# Altium PCB A2_v40.PcbDoc
Units mm, origin at the board's own origin, x right, y up, seen from the top; angles counter-clockwise.
Board outline 94 x 75 mm, 2 copper layers (Top Layer, Bottom Layer); 20 components, 28 nets, 109 pads, 0 vias.
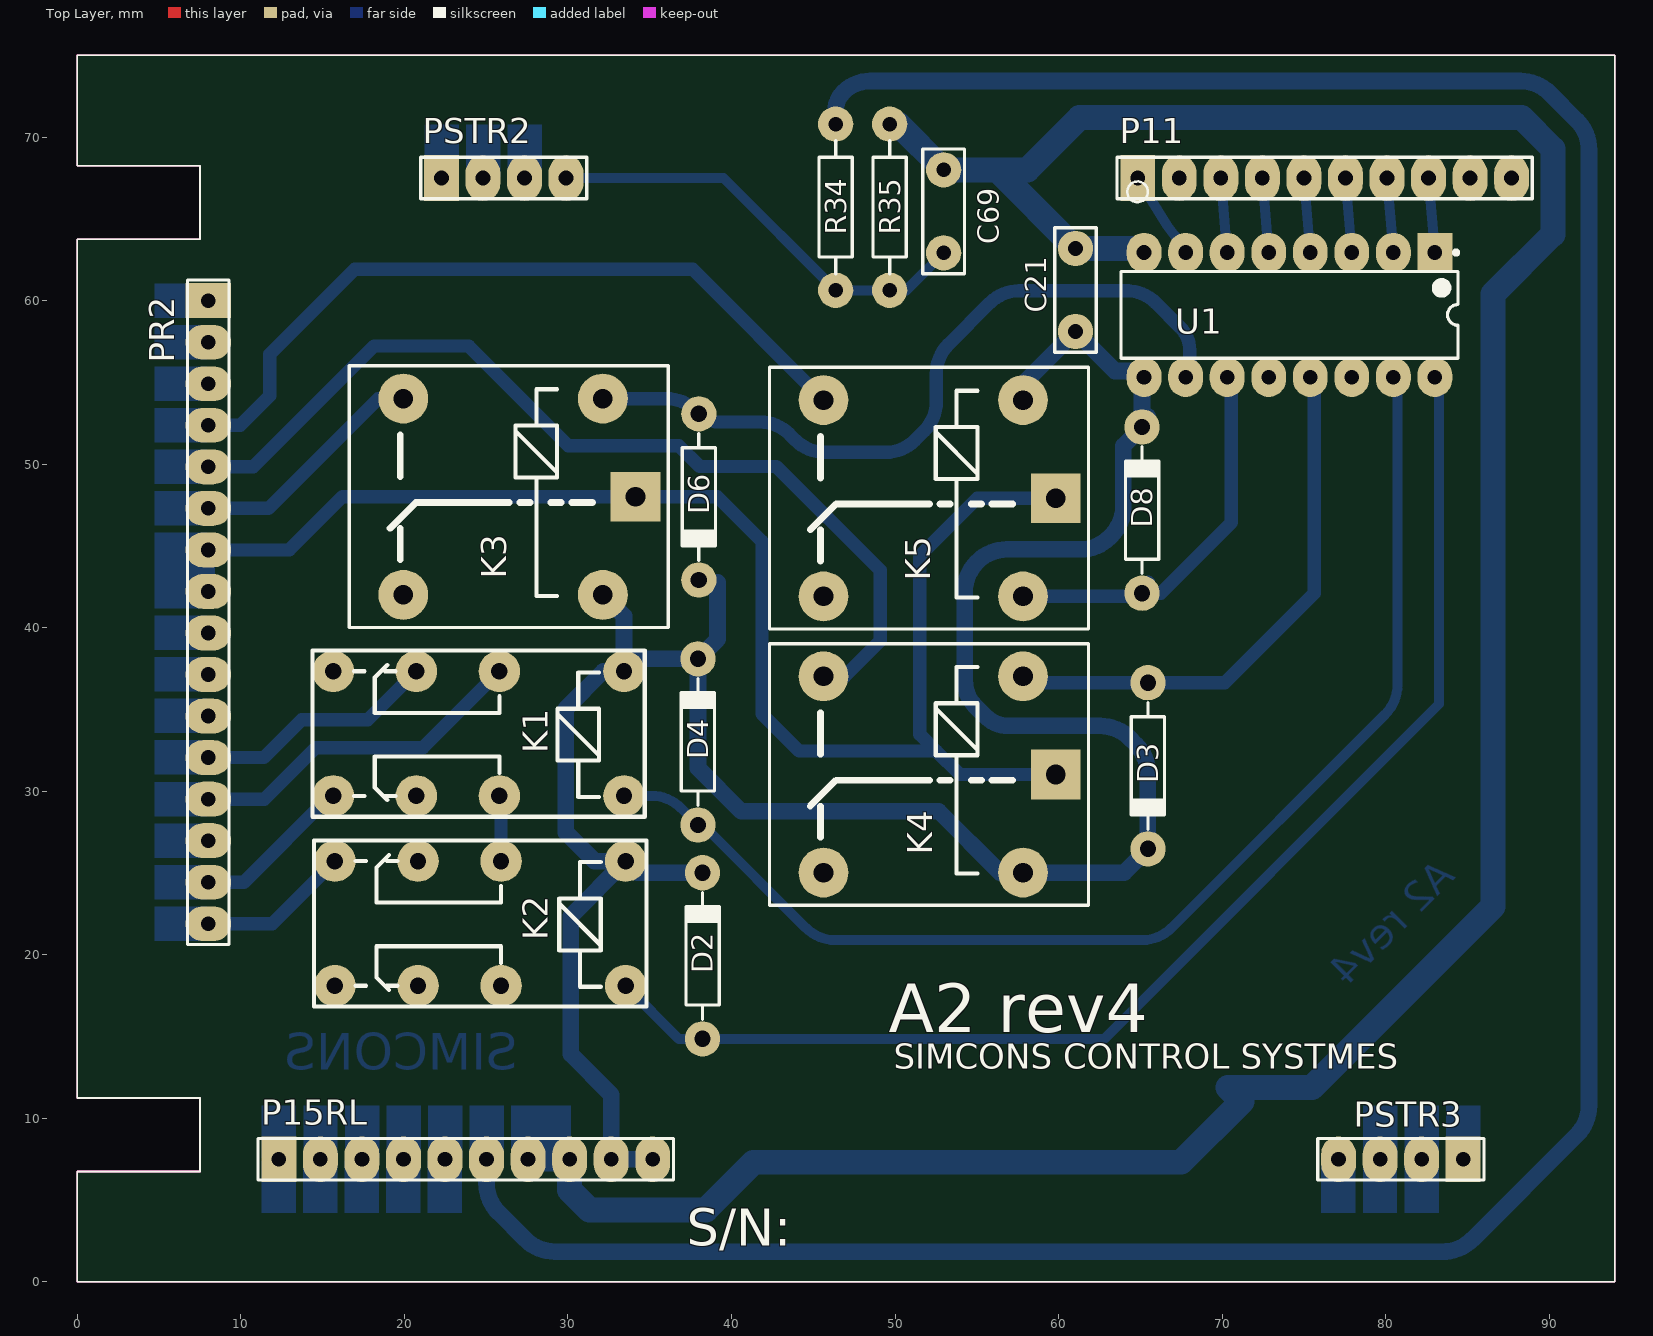
[diagram p0: Top Layer view]
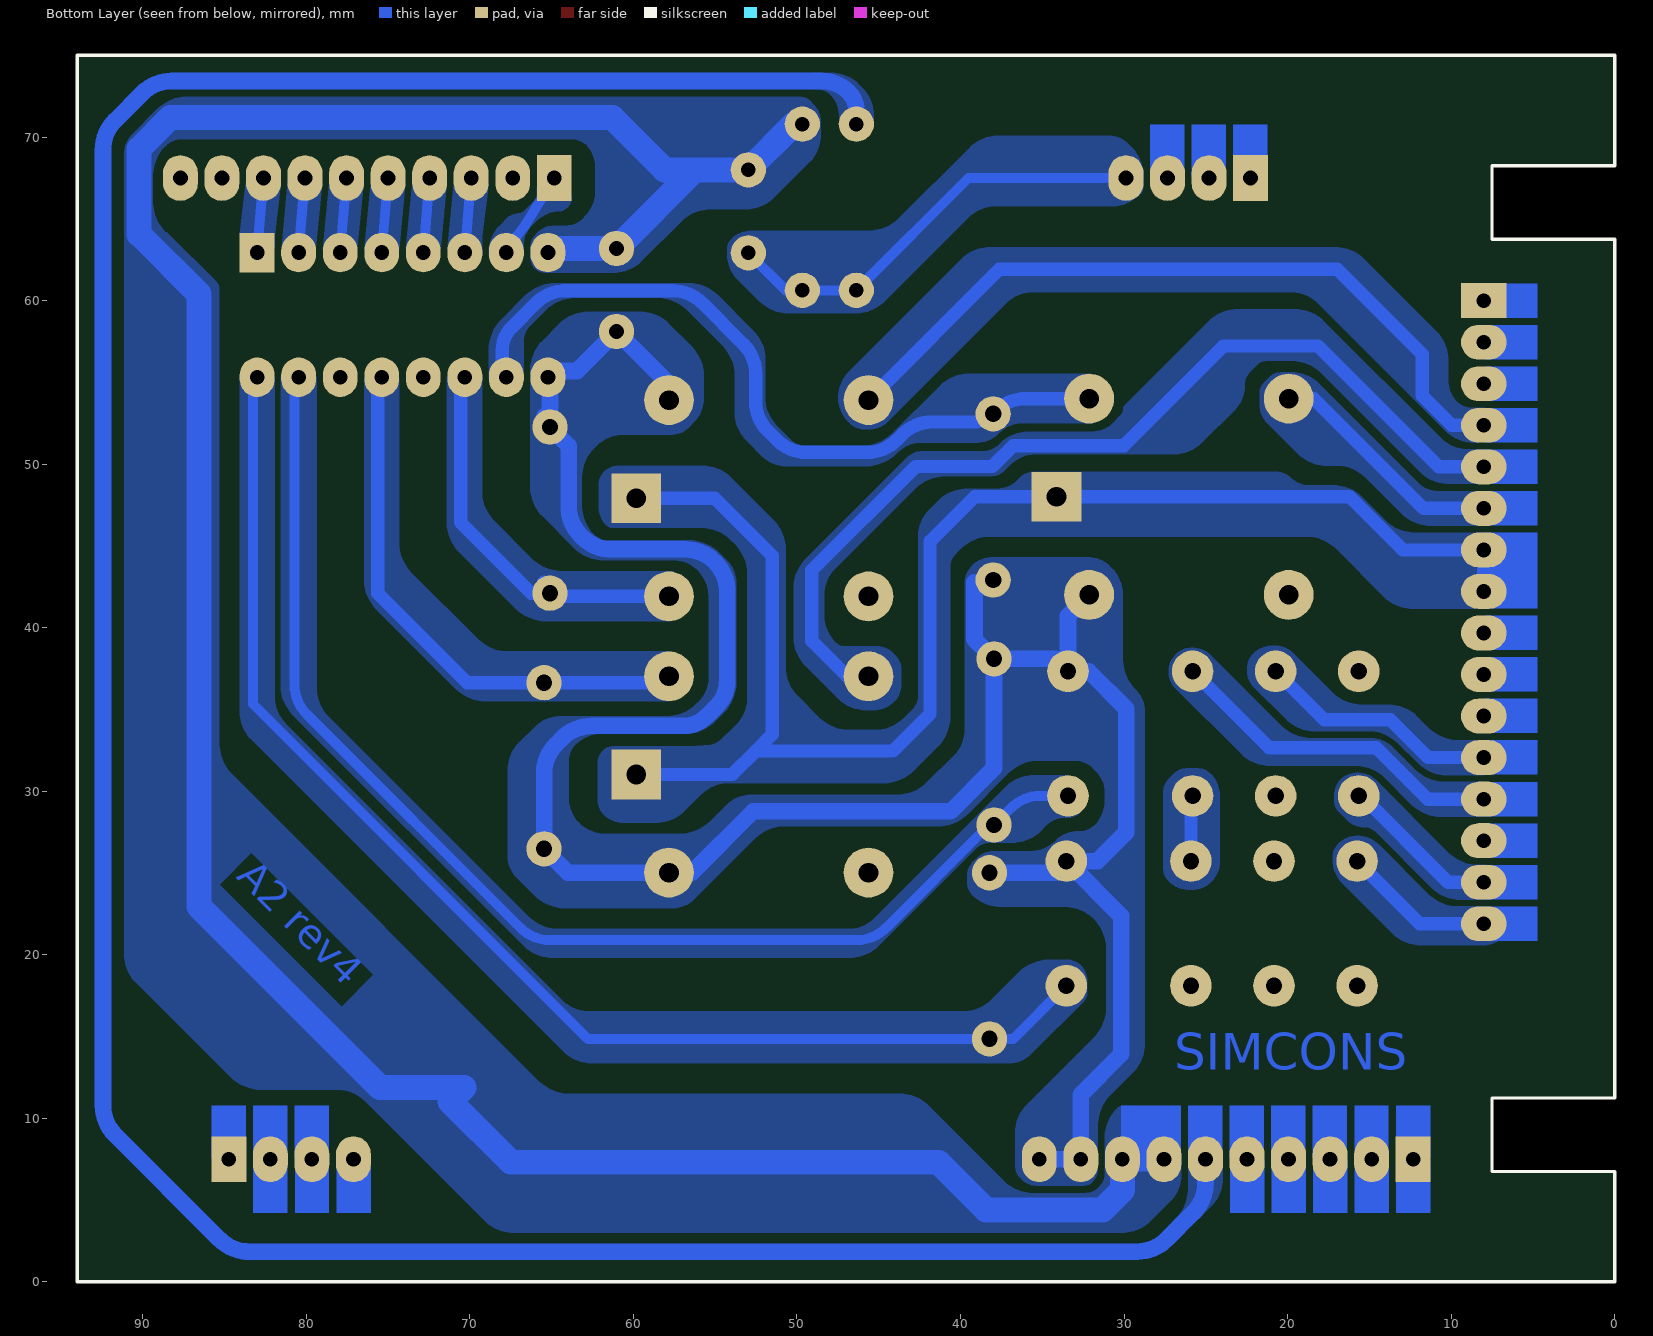
[diagram p1: Bottom Layer view, seen from below]
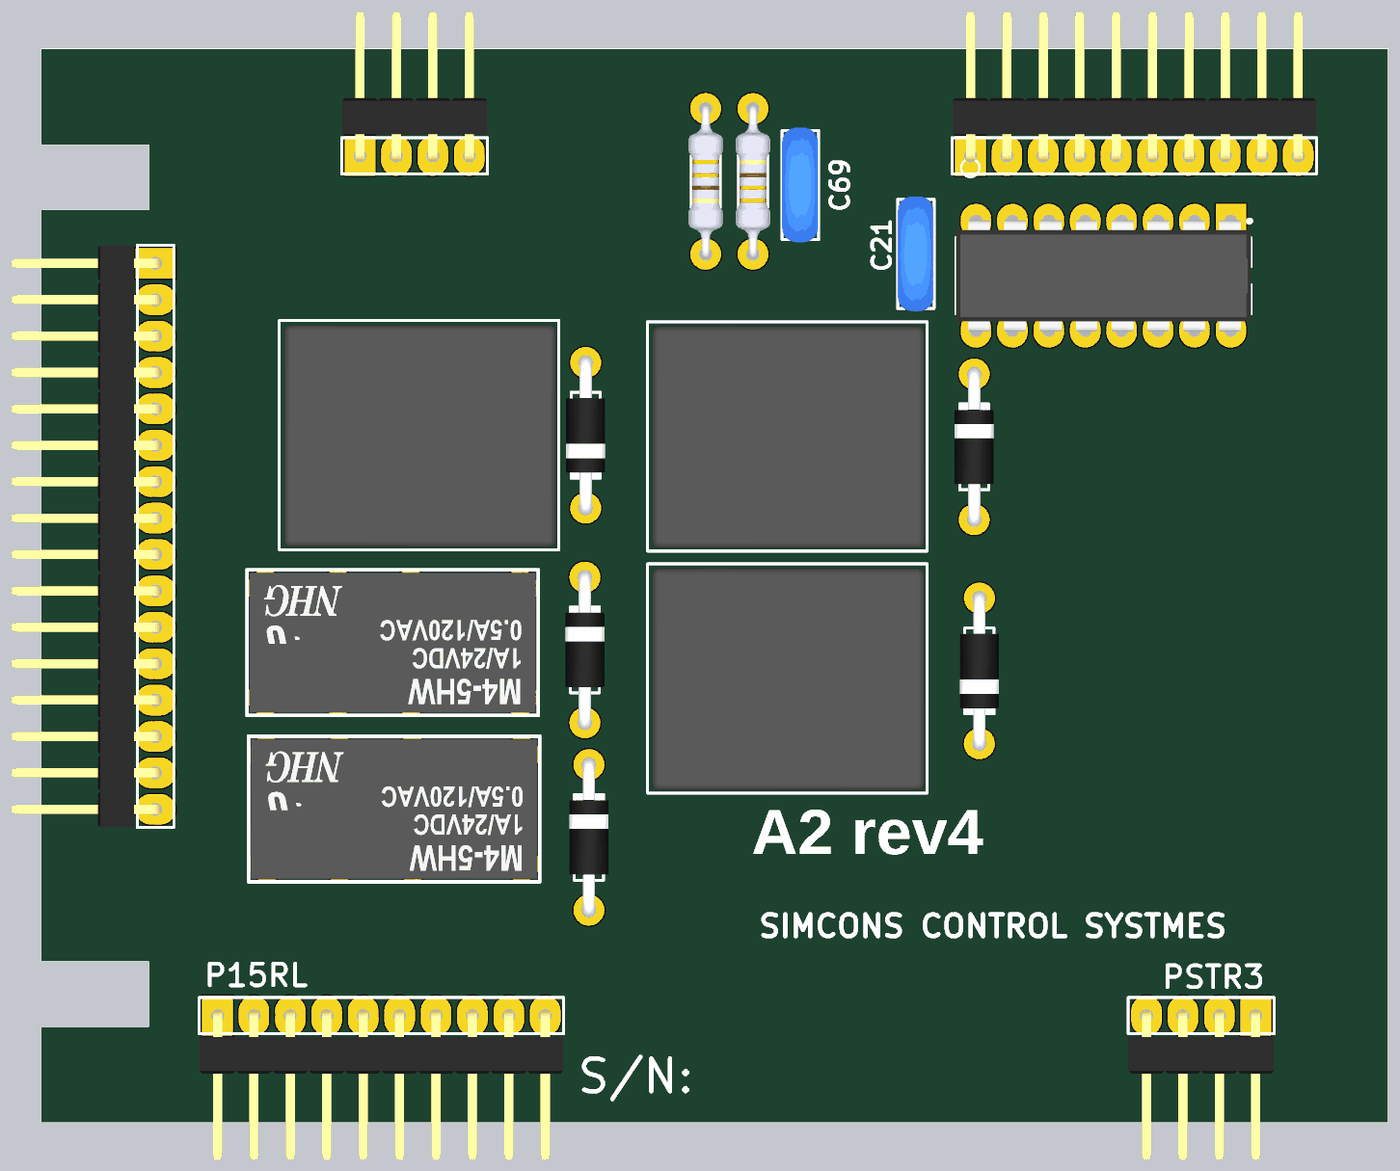
[diagram p2: 3D render of the assembled board from above, using the file's embedded part models]

## Layer stack, top to bottom
Top Solder: solder mask 0.0102, Solder Resist, Dk 3.5
Top Layer: signal copper 0.0356
Dielectric1: dielectric 0.32, FR-4, Dk 4.8
Bottom Layer: signal copper 0.0356
Bottom Solder: solder mask 0.0102, Solder Resist, Dk 3.5

## Board outline
0,75 94,75 94,0 0,0 0,6.75 7.5,6.75 7.5,11.25 0,11.25 0,63.75 7.5,63.75 7.5,68.25 0,68.25 0,75

## Design rules (kind name [scope] priority, off if disabled: settings)
Clearance [All] p1: gap=0.356 ignorepadtopadclearanceinfootprint=FALSE
MinimumSolderMaskSliver [All] p1: minsoldermaskwidth=0
PolygonConnect [All] p1: connectstyle=Direct reliefconductorwidth=0.254 reliefentries=4 polygonreliefangle="90 Angle" airgapwidth=0.254
RoutingVias [All] p1: holewidth=0.711 width=1.905 viastyle="Through Hole" minholewidth=0.711 minwidth=1.905 maxholewidth=1.27 maxwidth=2.286
SilkToSilkClearance [All] p1: silktosilkclearance=0
SilkToSolderMaskClearance SilkscreenOverComponentPads [IsPad] p1: minsilkscreentomaskgap=0 clearancetoexposedcopper=TRUE
SolderMaskExpansion [All] p1: expansion=0.102
Width [All] p1: maxlimit=1.778 minlimit=0.457 preferedwidth=1.118
27 further rules are at their usual default settings.

## Components (designator, comment, footprint, x,y, rotation, side; value= is the part's Value field where it differs from the comment)
C21 "1uF 1206" "CAP DISC .2" 61.036,60.655 r270 top value=100pF
C69 "1uF 1206" "CAP DISC .2" 52.972,65.462 r270 top value=100nF
D2 "1N4007" DIODE1A 38.227,19.939 r90 top
D3 "1N4007" DIODE1A 65.462,31.558 r270 top
D4 "1N4007" DIODE1A 37.947,33.02 r90 top
D6 "1N4007" DIODE1A 38,48 r270 top
D8 "1N4007" DIODE1A 65.1,47.193 r90 top
K1 "46-12-2CE" RELAYDPDT 25.806,32.258 r180 top locked
K2 "46-12-2CE" RELAYDPDT 25.908,20.65 r180 top locked
K3 "61-06-1CE" RELAY 32.131,54.011 r180 top locked
K4 "61-06-1CE" RELAY 57.825,37.03 r180 top locked
K5 "61-06-1CE" RELAY 57.825,53.921 r180 top locked
P11 "Header 10" HDR1X10_BURGE_M2 64.84,67.5 r0 top locked
P15RL "Header 10" HDR1X10_BURGE_M 12.32,7.5 r0 top locked
PR2 "Header 16" HDR1X16_BURGE_M 8,60 r270 top locked
PSTR2 "Header 4" HDR1X4_BURGE_M 22.26,67.5 r0 top locked
PSTR3 "Header 4" HDR1X4_BURGE_M 84.74,7.5 r180 top locked
R34 "47K 1206" AXIAL-0.4 46.368,65.716 r90 top value=4.7K
R35 "4.7K 1206" AXIAL-0.4 49.67,65.716 r270 top value=1K
U1 "ULN2003A" DIP-16 74.117,59.131 r270 top

## Footprints (in the part's own frame and the unit in brackets; to place one, negate y for a bottom-side part, rotate by r counter-clockwise, add the part's x,y. Pads: shape width x height; smd on the part's side, far side on the other; paste and mask are expansions set on the pad)
AXIAL-0.4 [mil] "Axial Device, Thru-Hole; 2 Leads; 0.4 in Pin Spacing"
  round 85 hole 35.43: 1(-200,0) 2(200,0)
  silkscreen extent -160,-40 160,40, body extent -212,-47 212,47, height 105
"CAP DISC .2" [mil] "Multi Layer Capacitor"
  round 85 hole 35.43: 1(-100,0) 2(100,0)
  silkscreen extent -150,-50 150,50, body extent -158,-50 157,48, height 413
DIODE1A [mil] "DIODE 1 AMPERE"
  round 85 hole 39.37: 1(-200,0) 2(200,0)
  silkscreen extent -152,-40 152,40, body extent -217,-54 217,54, height 107
DIP-16 [mil] "DIP; 16 Leads; Row Spacing 7.62 mm; Pitch 2.54 mm"
  rect 95x84 hole 35.43: 1(-150,350)
  oval 95x84 hole 35.43: 2(-150,250) 3(-150,150) 4(-150,50) 5(-150,-50) 6(-150,-150) 7(-150,-250) 8(-150,-350) 9(150,-350) 10(150,-250) 11(150,-150) 12(150,-50) 13(150,50) 14(150,150) 15(150,250) 16(150,350)
  silkscreen extent -155,-406 104,406, body extent -153,-406 153,406, height 177
HDR1X4_BURGE_M [mil] "Connector; Header; 4 Position"
  rect 84x110 hole 35.43: 1(0,0)
  oval 84x110 hole 35.43: 2(100,0) 3(200,0) 4(300,0)
  silkscreen extent -50,-50 350,50, body extent -50,-12 350,395, height 101
HDR1X10_BURGE_M [mil] "Connector; Header; 10 Position"
  rect 84x110 hole 35.43: 1(0,0)
  oval 84x110 hole 35.43: 2(100,0) 3(200,0) 4(300,0) 5(400,0) 6(500,0) 7(600,0) 8(700,0) 9(800,0) 10(900,0)
  silkscreen extent -50,-50 950,50, body extent -50,-395 950,12, height 101
HDR1X10_BURGE_M2 [mil] "Connector; Header; 10 Position"
  rect 84x110 hole 35.43: 1(0,0)
  oval 84x110 hole 35.43: 2(100,0) 3(200,0) 4(300,0) 5(400,0) 6(500,0) 7(600,0) 8(700,0) 9(800,0) 10(900,0)
  silkscreen extent -50,-50 950,50, body extent -50,-12 950,395, height 101
HDR1X16_BURGE_M [mil] "Connector; Header; 16 Position"
  rect 84x110 hole 35.43: 1(0,0)
  oval 84x110 hole 35.43: 2(100,0) 3(200,0) 4(300,0) 5(400,0) 6(500,0) 7(600,0) 8(700,0) 9(800,0) 10(900,0) 11(1000,0) 12(1100,0) 13(1200,0) 14(1300,0) 15(1400,0) 16(1500,0)
  silkscreen extent -50,-50 1550,50, body extent -50,-395 1550,13, height 101
RELAY [mm] "SPDT RELAY"
  rect 3.048x3.048 hole 1.2: 1(-2,6)
  round 3.048 hole 1.2: 2(12.2,12) 3(12.2,0) 4(0,12) 5(0,0)
  silkscreen extent -4,-2 15.5,14, body extent -3.81,-1.7 15.19,13.8, height 15.53
RELAYDPDT [mm] "DPDT RELAY"
  round 2.54 hole 1: 1(-7.62,2.54) 4(0,2.54) 6(5.08,2.54) 8(10.16,2.54) 9(10.16,-5.08) 11(5.08,-5.08) 13(0,-5.08) 16(-7.62,-5.08)
  silkscreen extent -8.89,-6.35 11.43,3.81, body extent -8.73,-6.17 11.27,3.63, height 12.05

## Part data
C21: library part Cap, "Capacitor", LatestRevisionDate=17-Jul-2002, LatestRevisionNote="Re-released for DXP Platform.", PackageDescription="Radial Cap, Thru-Hole; 2 Leads; 0.3 in Pin Spacing", PackageReference=RAD-0.3, Published=8-Jun-2000, Publisher="Altium Limited"
C69: library part CAP, "Capacitor", LatestRevisionDate=17-Jul-2002, LatestRevisionNote="Re-released for DXP Platform.", PackageDescription="Radial Cap, Thru-Hole; 2 Leads; 0.3 in Pin Spacing", PackageReference=RAD-0.3, Published=8-Jun-2000, Publisher="Altium Limited"
D2 D3 D4 D6 D8: library part "Diode 1N5408", "Small Signal Fast Switching Diode", ComponentLink1Description="Manufacturer Link", ComponentLink1URL=http://www.irf.com/, DatasheetVersion=Aug-1984, LatestRevisionDate=17-Jul-2002, LatestRevisionNote="Re-released for DXP Platform.", PackageDescription="Diode, Axial; Body 9.5 x 5.3 mm (LxDia. max), Lead Dia. 1.32 mm (max)", PackageReference=DO-201AD, Published=8-Jun-2000, Publisher="Altium Limited"
K1 K2: library part RELAYDPDT, "DPDT RELAY"
K3 K4 K5: library part Relay, "SPDT Relay", LatestRevisionDate=17-Jul-2002, LatestRevisionNote="Re-released for DXP Platform.", PackageReference=MODULE5B, Published=8-Jun-2000, Publisher="Altium Limited"
P11 P15RL: "Header, 10-Pin", LatestRevisionDate=17-Jul-2002, LatestRevisionNote="Re-released for DXP Platform.", Publisher="Altium Limited"
PR2: "Header, 16-Pin", LatestRevisionDate=17-Jul-2002, LatestRevisionNote="Re-released for DXP Platform.", Publisher="Altium Limited"
PSTR2 PSTR3: "Header, 4-Pin", LatestRevisionDate=17-Jul-2002, LatestRevisionNote="Re-released for DXP Platform.", Publisher="Altium Limited"
R34 R35: library part Res1, "Resistor", LatestRevisionDate=17-Jul-2002, LatestRevisionNote="Re-released for DXP Platform.", PackageDescription="Axial Device, Thru-Hole; 2 Leads; 0.3 in Pin Spacing", PackageReference=AXIAL-0.3, Published=8-Jun-2000, Publisher="Altium Limited"
U1: "Seven Darlington Array", ComponentLink1Description="Manufacturer Link", ComponentLink1URL=http://www.st.com/, ComponentLink2Description=Datasheet, ComponentLink2URL=http://www.st.com/stonline/products/literature/ds/5279/uln2001.pdf, DatasheetVersion=Sep-1998, LatestRevisionDate=06-Jun-2005, LatestRevisionNote="Stylized 3D Model Added.", PackageDescription="DIP; 16 Leads; Row Spacing 7.62 mm; Pitch 2.54 mm", PackageReference=DIP16, PackageVersion=Apr-1996, Published=8-Jun-2000, Publisher="Altium Limited"

## Nets (pads, with @x,y where several pads share a name; then routed paths per layer and width w, separated by ;. In a path a pad name is that pad's centre, name@x,y a point inside that pad or via, vN(x,y) a via of type N, cw(c..) or ccw(c..) an arc to the next point about the centre after c; other vN are vias at no path point)
+12: C21.2 D2.2 D3.2 D4.2 D6.2 D8.2 K1.16 K2.16 K3.4 K4.4 K5.5 P15RL.9 P15RL.10 U1.9 | length 154.6
  Bottom Layer w1.016: K3.4 33.426,40.716 K1.16 ; P15RL.10 P15RL.9 32.64,11.454 30.175,13.919 30.175,22.377 K2.16 ; D2.2 34.239,25.019 K2.16 ; 39.141,42.773 39.141,39.293 D4.2 ; K5.5 57.825,54.904 C21.2 63.449,55.702 65.481,55.702 65.1,55.321 D8.2 63.957,51.13 63.957,47.412 cw(c61.417,47.412) 63.213,45.615 63.133,45.535 cw(c61.337,47.331) 61.337,44.791 56.837,44.791 ccw(c56.837,42.251) 55.041,44.047 55.001,44.008 ccw(c56.789,42.22) 54.261,42.22 54.261,36.779 ccw(c56.503,36.779) 54.917,35.194 55.533,34.578 ccw(c56.938,35.983) 56.938,33.996 62.549,33.996 cw(c62.549,31.456) 64.345,33.252 64.718,32.879 cw(c62.922,31.083) 65.462,31.083 D3.2 64.014,25.03 K4.4 56.42,25.03 52.672,28.778 40.589,28.778 37.947,31.42 D4.2 ; D8.2@65.183,52.665 D8.2@65.462,52.945 ; K1.16 32.156,37.338 29.87,35.052 29.87,27.483 31.623,25.73 K2.16 ; K1.16 34.188,38.1 D4.2
BAT: P15RL.6 R34.2 | length 183.5
  Bottom Layer w1.016: P15RL.6 25.02,6.029 ccw(c27.56,6.029) 25.764,4.233 27.399,2.598 ccw(c29.195,4.394) 29.195,1.854 83.504,1.854 ccw(c83.504,4.394) 83.902,1.885 ccw(c83.504,4.394) 85.3,2.598 91.686,8.984 ccw(c89.89,10.78) 92.43,10.78 92.43,69.229 ccw(c89.89,69.229) 92.049,70.568 ccw(c89.89,69.229) 91.686,71.026 90.025,72.687 ccw(c88.229,70.891) 88.229,73.431 48.493,73.431 ccw(c48.493,71.09) 46.837,72.745 ccw(c47.971,71.612) 46.368,71.612 R34.2
BATMEASURE: C69.2 PSTR2.4 R34.1 R35.2 | length 26.9
  Bottom Layer w0.61: PSTR2.4 39.504,67.5 R34.1 R35.2 50.686,60.636 C69.2
DIGITALIN: K3.1 K4.1 K5.1 PR2.7 PR2.8 | length 91.2
  Bottom Layer w0.813: PR2.8 PR2.7 12.959,44.76 16.211,48.011 K3.1 39.136,48.011 41.859,45.288 41.859,34.747 44.145,32.461 52.527,32.461 ; K4.1@59.743,30.948 K4.1 53.958,31.03 52.527,32.461 ; K5.1 55.033,47.921 51.511,44.399 51.511,33.477 52.527,32.461
GC_LINK: K1.4 K2.13 | length 4
  Bottom Layer w0.813: K1.4 25.908,29.616 K2.13
GC_VIN: K2.9 PR2.16 | length 9.3
  Bottom Layer w0.813: PR2.16 11.918,21.9 K2.9
GC_VOUT: K1.8 PR2.15 | length 9.8
  Bottom Layer w0.813: PR2.15 10.191,24.44 15.468,29.718 K1.8
GND: C21.1 C69.1 P15RL.7 P15RL.8 R35.1 U1.8 | length 173.6
  Bottom Layer w1.524: P15RL.7 P15RL.8 30.1,5.612 31.318,4.394 38.43,4.394 41.351,7.315 67.488,7.315 71.209,11.036 70.351,11.893 75.495,11.893 86.563,22.961 86.563,60.401 90.221,64.059 90.221,69.291 88.316,71.196 61.29,71.196 58.096,68.002 56.229,68.002 ; R35.1 50.178,70.796 C69.1 56.229,68.002 ; U1.8@65.354,63.195 C21.1 56.229,68.002
MC_VIN: K1.13 PR2.13 | length 21
  Bottom Layer w0.813: PR2.13 11.435,29.52 14.579,32.664 21.133,32.664 K1.13
MC_VOUT: K1.11 PR2.12 | length 14.9
  Bottom Layer w0.813: PR2.12 11.41,32.06 13.716,34.366 17.754,34.366 K1.11
RL_6: P11.2
RL_7: P11.4 U1.5 | length 4.6
  Bottom Layer w0.61: P11.4 U1.5
RL_BUZZER: P11.3 U1.6 | length 4.6
  Bottom Layer w0.61: P11.3 U1.6
RL_GC: P11.8 U1.1 | length 4.6
  Bottom Layer w0.61: P11.8 U1.1
RL_MANUAL: P11.6 U1.3 | length 4.6
  Bottom Layer w0.61: P11.6 U1.3
RL_MC: P11.7 U1.2 | length 4.6
  Bottom Layer w0.61: P11.7 U1.2
RL_SOL: P11.5 U1.4 | length 4.6
  Bottom Layer w0.61: P11.5 U1.4
RL_START: P11.1 U1.7 | length 5.4
  Bottom Layer w0.61: P11.1 66.642,64.592 67.132,63.957 U1.7
RO_7: U1.12
RO_BUZZER: D8.1 K5.4 U1.11 | length 24.6
  Bottom Layer w0.813: K5.4 64.908,41.921 D8.1 66.243,42.113 70.561,46.431 U1.11@70.561,55.702 ; D8.1@64.958,42.255 D8.1@65.488,42.785
RO_GC: D4.1 K1.1 U1.15 | length 76.7
  Bottom Layer w0.61: K1.1 35.117,29.718 cw(c35.117,27.178) 36.913,28.974 D4.1 cw(c37.947,27.204) D4.1@38.467,27.725 ; D4.1@38.468,27.724 44.544,21.648 ccw(c46.34,23.444) 46.34,20.904 65.115,20.904 ccw(c65.115,23.444) 66.911,21.648 79.977,34.714 ccw(c78.181,36.51) 80.721,36.51 U1.15@80.721,55.702
RO_MAN: U1.14
RO_MC: D2.1 K2.1 U1.16 | length 79.9
  Bottom Layer w0.61: K2.1 36.779,14.859 D2.1 62.789,14.859 83.261,35.331 U1.16@83.261,55.702
RO_SOL: D3.1 K4.5 U1.13 | length 33.8
  Bottom Layer w0.813: K4.5 58.217,36.638 D3.1 70.166,36.638 75.641,42.113 U1.13@75.641,55.702
RO_START: D6.1 K3.5 U1.10 | length 45.8
  Bottom Layer w0.813: K3.5 36.016,54.011 cw(c36.016,51.471) 37.813,53.267 D6.1 ccw(c39.212,54.292) 39.212,52.578 41.747,52.578 cw(c41.747,50.038) 43.543,51.834 43.909,51.468 ccw(c45.705,53.264) 45.705,50.724 49.417,50.724 ccw(c49.417,53.264) 51.214,51.468 51.783,52.037 ccw(c49.987,53.833) 52.527,53.833 52.527,55.539 cw(c55.067,55.539) 53.271,57.335 55.796,59.86 cw(c57.592,58.064) 57.592,60.604 64.149,60.604 cw(c64.149,58.064) 64.401,60.592 cw(c64.149,58.064) 65.946,59.86 67.446,58.36 cw(c66.059,56.972) 68.021,56.972 U1.10@68.021,55.702
VOUT_BUZZER: K5.3 PR2.4 | length 46.4
  Bottom Layer w0.813: PR2.4 9.962,52.38 11.76,54.178 11.76,56.718 16.967,61.925 37.621,61.925 K5.3
VOUT_SOL: K4.3 PR2.5 | length 58.5
  Bottom Layer w0.813: PR2.5 10.749,49.84 18.135,57.226 23.927,57.226 30.023,51.13 36.779,51.13 38.049,49.86 42.748,49.86 49.098,43.51 49.098,39.192 46.936,37.03 K4.3
VOUT_START: K3.3 PR2.6 | length 14.7
  Bottom Layer w0.813: PR2.6 11.689,47.3 18.401,54.011 K3.3
pads on no net: K1.6 K1.9 K2.4 K2.6 K2.8 K2.11 K3.2 K4.2 K5.2 P11.9 P11.10 P15RL.1 P15RL.2 P15RL.3 P15RL.4 P15RL.5 PR2.1 PR2.2 PR2.3 PR2.9 PR2.10 PR2.11 PR2.14 PSTR2.1 PSTR2.2 PSTR2.3 PSTR3.1 PSTR3.2 PSTR3.3 PSTR3.4
copper on no net: | length 736
  Top Layer w0.102: 0,0 94,0 94,75 0,75 0,68.25 7.5,68.25 7.5,63.75 0,63.75 0,11.25 7.5,11.25 7.5,6.75 0,6.75 0,0
  Bottom Layer w0.102: 0,0 94,0 94,75 0,75 0,68.25 7.5,68.25 7.5,63.75 0,63.75 0,11.25 7.5,11.25 7.5,6.75 0,6.75 0,0

## Polygon pours and split planes (outlines as drawn)
GND on Bottom Layer "NONET_L-01_P-001" (solid, pour order 62): 30.099,10.769 cw(c30.099,10.34) 30.402,10.644 30.422,10.624 cw(c28.626,8.828) 31.166,8.828 31.166,7.417 29.618,7.417 ccw(c29.618,6.983) 29.311,7.29 cw(c29.679,7.658) 29.159,7.658 29.159,10.769
BAT on Bottom Layer "NONET_L-01_P-001" (solid, pour order 60): 47.422,70.612 47.422,71.341 cw(c49.156,71.341) 47.93,72.568 cw(c48.788,71.709) 48.788,72.923 49.149,72.923 49.149,73.817 ccw(c48.975,73.817) 49.098,73.939 47.955,73.939 ccw(c47.955,71.424) 46.177,73.203 46.032,73.058 ccw(c47.828,71.261) 45.288,71.261 45.288,70.713
RO_START on Bottom Layer "NONET_L-01_P-001" (solid, pour order 58): 31.902,52.502 36.196,52.502 cw(c36.196,50.42) 37.668,51.892 ccw(c39.078,53.302) 39.078,51.308 42.394,51.308 cw(c42.394,49.226) 43.866,50.698 43.934,50.629 ccw(c45.731,52.425) 45.731,49.885 50.673,49.885 ccw(c50.673,51.97) 52.147,50.496 53.053,51.402 ccw(c51.257,53.198) 53.797,53.198 53.797,55.437 cw(c56.337,55.437) 54.541,57.233 56.769,59.461 cw(c58.486,57.744) 58.486,60.172 63.565,60.172 cw(c63.565,57.632) 65.361,59.428 66.319,58.471 cw(c65.399,57.551) 66.7,57.551 66.7,55.194 68.772,55.194 ccw(c68.772,55.281) 68.834,55.219 68.834,57.037 ccw(c66.294,57.037) 68.09,58.834 66.606,60.317 ccw(c64.81,58.521) 64.81,61.061 56.602,61.061 ccw(c56.602,58.521) 54.806,60.317 52.687,58.199 ccw(c54.483,56.402) 51.943,56.402 51.943,54.113 cw(c49.403,54.113) 51.199,52.316 50.419,51.536 cw(c49.438,52.518) 49.438,51.13 45.985,51.13 cw(c45.985,53.67) 44.188,51.874 41.282,54.78 ccw(c39.486,52.984) 39.486,55.524 32.08,55.524
RL_GC on Bottom Layer "NONET_L-01_P-001" (solid, pour order 56): 81.94,63.932 81.559,67.081 82.016,67.691 83.693,67.208 84.074,64.084 83.464,63.195 81.94,63.17
RL_MC on Bottom Layer "NONET_L-01_P-001" (solid, pour order 54): 79.019,67.157 79.426,63.22 81.508,63.271 81.127,67.31
RL_MANUAL on Bottom Layer "NONET_L-01_P-001" (solid, pour order 52): 76.886,63.22 76.479,67.183 78.613,67.208 78.994,63.093 78.384,63.043
RL_SOL on Bottom Layer "NONET_L-01_P-001" (solid, pour order 50): 74.32,63.119 73.939,67.132 76.073,67.157 76.454,63.119
RL_7 on Bottom Layer "NONET_L-01_P-001" (solid, pour order 48): 71.78,63.17 71.399,67.107 73.533,67.157 73.914,63.17
RL_BUZZER on Bottom Layer "NONET_L-01_P-001" (solid, pour order 46): 69.24,62.865 69.24,63.957 68.859,67.107 70.993,67.157 71.374,63.119 70.586,62.941
RL_START on Bottom Layer "NONET_L-01_P-001" (solid, pour order 44): 63.779,66.421 63.779,66.215 ccw(c64.386,66.215) 63.957,65.786 64.09,65.653 ccw(c64.567,66.13) 64.567,65.456 cw(c64.567,63.616) 65.867,64.917 66.268,64.516 cw(c65.226,63.473) 66.7,63.473 66.7,62.839 68.711,62.839 cw(c68.711,62.666) 68.834,62.789 68.834,62.962 ccw(c66.492,62.962) 68.148,64.617 67.67,65.095 ccw(c67.107,64.531) 67.107,65.329 cw(c67.107,65.942) 66.673,65.508 66.091,66.091 cw(c66.52,66.52) 65.913,66.52 65.913,66.929 65.725,67.117 ccw(c65.075,66.466) 65.075,67.386
RO_SOL on Bottom Layer "NONET_L-01_P-001" (solid, pour order 42): 57.81,38.557 67.705,38.557 ccw(c67.705,41.097) 69.502,39.301 73.576,43.376 ccw(c71.78,45.172) 74.32,45.172 74.32,55.27 76.392,55.27 ccw(c76.392,55.357) 76.454,55.296 76.454,42.911 cw(c73.914,42.911) 75.71,41.115 70.848,36.253 cw(c69.052,38.049) 69.052,35.509 57.734,35.509
RO_BUZZER on Bottom Layer "NONET_L-01_P-001" (solid, pour order 40): 57.531,43.459 64.378,43.459 ccw(c64.378,45.999) 66.174,44.203 68.58,46.609 ccw(c66.985,48.203) 69.24,48.203 69.24,55.321 cw(c69.302,55.26) 69.302,55.346 71.399,55.346 71.399,46.416 cw(c68.859,46.416) 70.655,44.62 67.19,41.155 cw(c65.394,42.951) 65.394,40.411 57.683,40.411
RO_MC on Bottom Layer "NONET_L-01_P-001" (solid, pour order 38): 32.258,18.399 cw(c33.645,18.399) 32.664,19.38 cw(c33.4,18.644) 33.4,19.685 34.635,19.685 cw(c34.635,17.145) 36.431,18.941 38.092,17.279 ccw(c39.889,19.075) 39.889,16.535 62.625,16.535 ccw(c62.625,19.075) 64.422,17.279 81.196,34.054 ccw(c79.4,35.85) 81.94,35.85 81.94,55.346 84.012,55.346 cw(c84.012,55.26) 84.074,55.321 84.074,34.936 cw(c81.534,34.936) 83.33,33.139 64.295,14.104 cw(c62.498,15.9) 62.498,13.36 37.033,13.36 cw(c37.033,15.261) 35.689,13.917 32.436,17.17 cw(c32.865,17.599) 32.258,17.599
RO_GC on Bottom Layer "NONET_L-01_P-001" (solid, pour order 36): 32.715,28.651 ccw(c33.328,29.264) 33.328,28.397 33.546,28.397 cw(c33.546,26.663) 34.772,27.889 35.07,27.592 ccw(c36.866,29.388) 36.866,26.848 38.171,26.848 cw(c38.171,25.547) 39.09,26.467 45.001,20.556 ccw(c46.797,22.352) 46.797,19.812 64.911,19.812 ccw(c64.911,22.352) 66.708,20.556 80.815,34.663 ccw(c79.019,36.46) 81.559,36.46 81.559,55.346 79.375,55.346 79.375,36.358 cw(c76.835,36.358) 78.631,34.562 66.403,22.334 cw(c64.607,24.13) 64.607,21.59 46.761,21.59 cw(c46.761,23.613) 45.33,22.182 37.269,30.244 ccw(c35.473,28.448) 35.473,30.988 33.477,30.988
BATMEASURE on Bottom Layer "NONET_L-01_P-001" (solid, pour order 34): 28.803,67.462 28.803,67.604 cw(c31.343,67.604) 29.547,69.4 29.769,69.621 cw(c30.872,68.517) 30.872,70.078 37.683,70.078 cw(c37.683,67.538) 39.479,69.334 43.782,65.031 ccw(c45.578,66.827) 45.578,64.287 52.774,64.287 cw(c52.774,62.553) 54,63.779 cw(c53.387,63.166) 54.254,63.166 54.254,62.839 cw(c52.047,62.839) 53.608,61.278 52.306,59.977 cw(c50.51,61.773) 50.51,59.233 46.416,59.233 cw(c46.416,61.773) 44.62,59.977 39.555,65.042 ccw(c37.759,63.246) 37.759,65.786 30.683,65.786 cw(c30.683,68.055) 29.079,66.45 28.981,66.548 cw(c29.349,66.916) 28.829,66.916 28.829,67.411
VOUT_BUZZER on Bottom Layer "NONET_L-01_P-001" (solid, pour order 0): 7.925,53.441 8.696,53.441 ccw(c8.696,54.829) 9.677,53.848 ccw(c8.512,55.013) 10.16,55.013 10.16,56.326 cw(c12.7,56.326) 10.904,58.122 15.309,62.527 cw(c17.105,60.731) 17.105,63.271 38.165,63.271 cw(c38.165,60.731) 39.961,62.527 46.79,55.699 cw(c45.142,54.051) 47.472,54.051 cw(c45.449,54.051) 46.88,52.62 46.71,52.451 cw(c45.975,53.187) 45.975,52.146 45.542,52.146 cw(c45.542,53.679) 44.458,52.595 37.269,59.784 ccw(c35.473,57.988) 35.473,60.528 19.873,60.528 ccw(c19.873,57.988) 18.077,59.784 10.345,52.052 cw(c8.549,53.848) 8.549,51.308 8.306,51.308 8.071,51.542 cw(c8.548,52.019) 7.874,52.019
VOUT_SOL on Bottom Layer "NONET_L-01_P-001" (solid, pour order 2): 7.975,50.901 8.879,50.901 ccw(c8.879,53.441) 10.675,51.645 17.772,58.743 cw(c19.569,56.947) 19.569,59.487 23.027,59.487 cw(c23.027,56.947) 24.823,58.743 29.976,53.589 cw(c29.803,53.416) 30.048,53.416 ccw(c30.661,53.416) 30.228,52.982 30.696,52.514 ccw(c31.953,53.772) 31.953,51.994 35.813,51.994 cw(c35.813,49.479) 37.592,51.257 ccw(c38.696,52.361) 38.696,50.8 42.342,50.8 cw(c42.342,49.512) 43.252,50.423 49.446,44.229 cw(c47.65,42.432) 50.19,42.432 50.19,39.431 cw(c47.65,39.431) 49.446,37.635 47.505,35.694 cw(c45.709,37.49) 45.709,34.95 45.339,34.95 cw(c45.339,36.729) 44.081,35.471 44.043,35.509 cw(c45.086,36.551) 43.612,36.551 43.612,37.373 cw(c44.999,37.373) 44.018,38.354 44.149,38.485 cw(c45.059,37.574) 45.059,38.862 47.001,38.862 ccw(c47.001,39.816) 47.676,39.141 ccw(c46.081,40.736) 48.336,40.736 48.336,42.011 ccw(c46.128,42.011) 47.689,43.572 42.755,48.506 ccw(c40.959,46.71) 40.959,49.25 38.176,49.25 cw(c38.176,50.477) 37.309,49.61 36.957,49.962 ccw(c35.424,48.429) 35.424,50.597 27,50.597 cw(c27,53.112) 25.222,51.333 23.242,53.313 cw(c24.716,54.788) 22.631,54.788 ccw(c21.343,54.788) 22.254,55.698 21.895,56.058 ccw(c21.281,55.444) 21.281,56.312 19.746,56.312 ccw(c19.746,53.772) 17.95,55.568 11.92,49.537 cw(c10.124,51.333) 10.124,48.793 7.95,48.793
VOUT_START on Bottom Layer "NONET_L-01_P-001" (solid, pour order 4): 7.874,48.361 10.788,48.361 ccw(c10.788,50.096) 12.014,48.869 18.026,54.882 cw(c19.823,53.086) 19.823,55.626 20.32,55.626 cw(c20.32,54.399) 21.187,55.267 21.437,55.016 cw(c20.824,54.403) 21.691,54.403 21.691,53.641 cw(c20.044,53.641) 21.209,52.476 19.387,50.655 cw(c17.591,52.451) 17.591,49.911 17.003,49.911 ccw(c17.003,47.371) 15.207,49.167 13.012,46.972 cw(c11.216,48.768) 11.216,46.228 7.848,46.228
DIGITALIN on Bottom Layer "NONET_L-01_P-001" (solid, pour order 6): 7.95,41.148 12.308,41.148 ccw(c12.308,43.688) 14.104,41.892 17.036,44.823 cw(c18.832,43.027) 18.832,45.567 38.191,45.567 cw(c38.191,43.027) 39.987,44.823 40.284,44.526 cw(c39.426,43.668) 40.64,43.668 40.64,34.529 ccw(c43.18,34.529) 41.384,32.733 42.868,31.249 ccw(c44.664,33.045) 44.664,30.505 54.163,30.505 cw(c54.163,28.077) 55.88,29.794 56.863,28.811 ccw(c58.659,30.607) 58.659,28.067 60.633,28.067 ccw(c60.633,29.714) 61.798,28.549 ccw(c60.878,29.469) 62.179,29.469 62.179,31.715 ccw(c61.052,31.715) 61.849,32.512 ccw(c61.236,31.899) 61.236,32.766 55.713,32.766 cw(c55.713,35.306) 53.917,33.51 ccw(c53.321,32.914) 53.321,33.756 45.223,33.756 cw(c45.223,36.296) 43.426,34.5 42.951,34.976 cw(c43.871,35.895) 42.57,35.895 42.57,45.624 ccw(c40.315,45.624) 41.91,47.218 41.358,47.77 ccw(c39.562,45.974) 39.562,48.514 37.744,48.514 cw(c37.744,50.231) 36.53,49.017 36.322,49.225 ccw(c35.586,48.489) 35.586,49.53 20.681,49.53 ccw(c20.681,48.229) 19.761,49.149 cw(c18.719,50.191) 18.719,48.717 17.232,48.717 ccw(c17.232,46.177) 15.436,47.973 14.028,46.565 cw(c12.232,48.361) 12.232,45.821 7.95,45.821
DIGITALIN on Bottom Layer "NONET_L-01_P-001" (solid, pour order 8): 45.593,33.756 46.827,33.756 ccw(c46.827,36.296) 48.623,34.5 49.954,35.832 ccw(c48.158,37.628) 50.698,37.628 50.698,44.795 cw(c53.238,44.795) 51.442,46.591 54.018,49.167 cw(c55.814,47.371) 55.814,49.911 60.878,49.911 cw(c60.878,48.61) 61.798,49.53 cw(c61.001,48.733) 62.128,48.733 62.128,47.382 cw(c60.567,47.382) 61.671,46.279 cw(c61.242,46.708) 61.242,46.101 55.84,46.101 ccw(c55.84,43.561) 54.044,45.357 53.779,45.092 ccw(c55.575,43.296) 53.035,43.296 53.035,35.611 ccw(c55.073,35.611) 53.632,34.169 54.891,32.91 ccw(c55.301,33.319) 55.301,32.74 56.515,32.74
DIGITALIN on Bottom Layer "NONET_L-01_P-001" (solid, pour order 10): 54.356,33.426 54.524,33.258 ccw(c55.713,34.447) 55.713,32.766 cw(c55.713,31.32) 56.735,32.342 57.328,31.75 57.056,31.478 cw(c55.259,33.274) 55.259,30.734 54.508,30.734 cw(c54.508,31.531) 53.945,30.967 53.137,31.775
MC_VOUT on Bottom Layer "NONET_L-01_P-001" (solid, pour order 12): 7.975,30.988 10.251,30.988 ccw(c10.251,33.528) 12.047,31.732 13.251,32.936 cw(c15.047,31.14) 15.047,33.68 18.328,33.68 ccw(c18.328,36.22) 20.124,34.424 22.022,36.322 ccw(c20.918,37.426) 22.479,37.426 22.479,37.49 ccw(c21.191,37.49) 22.102,38.401 22.047,38.455 ccw(c21.005,37.413) 21.005,38.887 20.666,38.887 ccw(c20.666,37.5) 19.685,38.481 17.254,36.05 cw(c15.458,37.846) 15.458,35.306 13.854,35.306 ccw(c13.854,32.766) 12.057,34.562 11.361,33.865 cw(c9.565,35.661) 9.565,33.121 7.925,33.121
MC_VIN on Bottom Layer "NONET_L-01_P-001" (solid, pour order 14): 7.874,30.581 10.403,30.581 ccw(c10.403,33.121) 12.199,31.325 13.583,32.71 cw(c14.884,31.409) 14.884,33.248 18.556,33.248 ccw(c18.556,35.788) 20.353,33.992 24.661,38.301 cw(c25.832,37.13) 25.832,38.786 cw(c25.832,37.375) 26.829,38.373 26.873,38.328 cw(c25.953,37.409) 27.254,37.409 27.254,37.211 cw(c26.028,37.211) 26.895,36.344 22.842,32.291 cw(c21.046,34.087) 21.046,31.547 15.835,31.547 ccw(c15.835,29.007) 14.039,30.803 12.428,29.192 cw(c10.632,30.988) 10.632,28.448 7.798,28.448
GC_VOUT on Bottom Layer "NONET_L-01_P-001" (solid, pour order 16): 7.823,25.501 8.371,25.501 ccw(c8.371,28.041) 10.167,26.245 14.613,30.691 cw(c15.697,29.607) 15.697,31.14 15.757,31.14 cw(c15.757,29.753) 16.738,30.734 cw(c15.757,29.753) 17.145,29.753 17.145,29.464 cw(c16.041,29.464) 16.822,28.683 16.364,28.226 cw(c15.367,29.223) 15.367,27.813 ccw(c15.367,26.709) 14.586,27.49 11.209,24.112 cw(c9.412,25.908) 9.412,23.368 7.772,23.368
GC_VIN on Bottom Layer "NONET_L-01_P-001" (solid, pour order 18): 7.95,22.961 9.59,22.961 ccw(c9.59,25.501) 11.386,23.705 14.404,26.723 cw(c15.748,25.378) 15.748,27.279 cw(c15.748,25.685) 16.875,26.812 16.891,26.797 cw(c16.032,25.938) 17.246,25.938 17.246,25.857 cw(c15.1,25.857) 16.618,24.339 13.596,21.318 cw(c11.8,23.114) 11.8,20.574 8.001,20.574 cw(c8.001,22.168) 6.873,21.041 6.756,21.158 cw(c7.124,21.526) 6.604,21.526 6.604,21.996 6.868,22.26 cw(c7.518,21.61) 7.518,22.53
GC_LINK on Bottom Layer "NONET_L-01_P-001" (solid, pour order 20): 24.155,29.776 cw(c25.976,29.776) 24.689,31.064 cw(c25.547,30.206) 25.547,31.42 26.136,31.42 cw(c26.136,30.254) 26.96,31.078 27.203,30.835 cw(c26.222,29.854) 27.61,29.854 27.61,25.344 cw(c26.396,25.344) 27.254,24.485 cw(c26.028,25.712) 26.028,23.977 25.828,23.977 cw(c25.828,25.625) 24.663,24.46 cw(c25.89,25.686) 24.155,25.686
+12 on Bottom Layer "NONET_L-01_P-001" (solid, pour order 22): 35.254,5.867 ccw(c35.254,7.341) 36.296,6.299 ccw(c35.438,7.157) 36.652,7.157 36.652,9.082 ccw(c34.112,9.082) 35.908,10.878 31.833,14.953 cw(c33.629,16.749) 31.089,16.749 31.089,20.396 cw(c33.604,20.396) 31.826,22.174 31.844,22.192 cw(c33.64,20.396) 33.64,22.936 37.551,22.936 ccw(c37.551,25.364) 39.268,23.647 ccw(c38.471,24.444) 39.598,24.444 39.598,24.816 ccw(c38.372,24.816) 39.239,25.683 38.989,25.933 ccw(c38.008,24.952) 38.008,26.34 35.721,26.34 cw(c35.721,28.508) 34.188,26.975 ccw(c32.778,25.564) 32.778,27.559 32.69,27.559 cw(c32.69,28.847) 31.779,27.936 cw(c33.26,29.417) 31.166,29.417 31.166,29.896 cw(c33.067,29.896) 31.722,31.24 31.902,31.42 cw(c33.006,30.316) 33.006,31.877 35.244,31.877 cw(c35.244,29.337) 37.04,31.133 39.566,28.608 ccw(c41.362,30.404) 41.362,27.864 50.764,27.864 cw(c50.764,25.324) 52.56,27.12 56.312,23.368 ccw(c57.538,24.594) 57.538,22.86 64.226,22.86 ccw(c64.226,25.4) 66.022,23.604 67.157,24.739 ccw(c65.87,26.027) 67.691,26.027 67.691,27.406 57.135,27.406 cw(c57.135,29.946) 55.339,28.15 54.33,29.159 ccw(c52.797,27.626) 52.797,29.794 43.851,29.794 cw(c43.851,32.334) 42.055,30.538 40.386,32.207 cw(c41.98,33.801) 39.725,33.801 39.725,42.711 ccw(c38.164,42.711) 39.268,43.815 ccw(c38.042,42.588) 38.042,44.323 32.246,44.323 ccw(c32.246,42.328) 30.835,43.739 30.774,43.677 ccw(c32.465,41.986) 30.073,41.986 30.073,38.06 cw(c27.533,38.06) 29.329,36.264 ccw(c30.783,34.81) 28.727,34.81 28.727,14.59 ccw(c31.267,14.59) 29.471,12.794 30.853,11.412 cw(c29.057,9.616) 31.597,9.616 31.597,6.95 ccw(c32.801,6.95) 31.95,6.099 31.953,6.096 ccw(c32.505,6.648) 32.505,5.867
+12 on Bottom Layer "NONET_L-01_P-001" (solid, pour order 24): 67.691,26.543 67.691,31.231 ccw(c65.151,31.231) 66.947,33.027 66.014,33.96 ccw(c64.481,32.427) 64.481,34.595 57.948,34.595 cw(c57.948,37.135) 56.152,35.339 55.981,35.509 cw(c57.392,36.919) 55.397,36.919 55.397,41.916 cw(c57.652,41.916) 56.058,43.51 cw(c57.529,42.038) 57.529,44.12 61.813,44.12 ccw(c61.813,46.66) 63.609,44.864 65.55,46.805 ccw(c63.754,48.601) 66.294,48.601 66.294,55.437 ccw(c63.754,55.437) 65.55,57.233 64.422,58.362 ccw(c62.626,56.566) 62.626,59.106 60.187,59.106 ccw(c60.183,56.566) 58.387,58.362 56.446,56.421 ccw(c58.242,54.625) 55.702,54.624 55.702,54.051 ccw(c57.848,54.051) 56.331,52.533 56.489,52.375 ccw(c57.838,53.724) 57.838,51.816 60.517,51.816 cw(c60.517,49.276) 62.313,51.072 62.4,50.985 cw(c60.604,49.189) 63.144,49.189 63.144,47.437 cw(c60.716,47.437) 62.433,45.72 cw(c61.513,46.64) 61.513,45.339 56.551,45.339 ccw(c56.551,42.799) 54.755,44.595 54.28,44.12 ccw(c55.629,42.771) 53.721,42.771 53.721,36.612 ccw(c56.261,36.612) 54.465,34.816 55.009,34.272 ccw(c56.805,36.068) 56.805,33.528 61.895,33.528 cw(c61.895,31.186) 63.551,32.842 cw(c62.57,31.861) 63.957,31.861 63.957,29.564 cw(c61.876,29.564) 63.347,28.092 cw(c61.692,29.748) 61.692,27.406 61.315,27.406 61.269,27.36 ccw(c62.873,25.755) 60.604,25.755 66.402,25.755 cw(c66.402,24.975) 66.954,25.527
+12 on Bottom Layer "NONET_L-01_P-001" (solid, pour order 26): 66.294,54.051 66.294,55.768 ccw(c63.754,55.768) 65.55,57.564 64.523,58.59 ccw(c62.727,56.794) 62.727,59.334 59.624,59.334 ccw(c59.624,56.794) 57.828,58.59 56.446,57.208 ccw(c58.242,55.412) 55.702,55.412 55.702,54.214 ccw(c58.242,54.214) 56.446,52.418 56.622,52.242 ccw(c57.712,53.331) 57.712,51.79 61.317,51.79 cw(c61.317,49.709) 62.789,51.181 63.299,50.67 ccw(c65.095,52.466) 65.095,49.926 66.294,49.926
GND on Bottom Layer "NONET_L-01_P-001" (solid, pour order 30): 26.492,7.771 cw(c27.966,7.771) 26.924,8.814 cw(c27.476,8.262) 27.476,9.042 30.079,9.042 cw(c30.079,7.828) 30.937,8.687 cw(c30.385,8.135) 31.166,8.135 31.166,6.675 ccw(c32.38,6.675) 31.521,5.816 ccw(c32.441,6.736) 32.441,5.435 35.549,5.435 ccw(c35.549,7.975) 37.345,6.179 41.928,10.762 cw(c43.724,8.966) 43.724,11.506 63.946,11.506 ccw(c63.946,14.046) 65.742,12.25 84.574,31.082 ccw(c82.778,32.878) 85.318,32.878 85.318,60.757 cw(c85.87,60.757) 85.48,61.147 88.465,64.132 cw(c88.595,64.002) 88.595,64.186 88.638,64.229 ccw(c86.842,66.025) 89.382,66.025 89.382,67.665 ccw(c86.93,67.665) 88.664,69.4 88.595,69.469 ccw(c87.614,68.488) 87.614,69.875 63.751,69.875 ccw(c63.749,68.661) 62.89,69.52 ccw(c64.239,68.171) 62.331,68.171 62.331,66.599 ccw(c64.294,66.599) 62.906,65.211 63.093,65.024 ccw(c64.136,66.066) 64.136,64.592 64.846,64.592 cw(c64.846,63.182) 65.843,64.179 66.04,63.982 cw(c65.427,63.369) 66.294,63.369 66.294,62.625 cw(c65.34,62.625) 66.014,61.95 cw(c65.401,62.564) 65.401,61.696 61.275,61.696 cw(c61.275,64.236) 59.479,62.44 57.081,64.839 ccw(c55.285,63.043) 55.285,65.583 53.111,65.583 cw(c53.111,67.974) 51.42,66.283 49.283,68.42 cw(c51.079,70.216) 48.539,70.216 48.539,70.942 cw(c50.011,70.942) 48.97,71.983 49.2,72.212 cw(c49.813,71.599) 49.813,72.466 87.314,72.466 cw(c87.314,69.926) 89.11,71.722 90.614,70.218 cw(c89.357,68.961) 91.135,68.961 91.135,20.077 cw(c88.595,20.076) 90.391,18.28 84.615,12.504 cw(c82.819,14.3) 82.818,11.76 78.166,11.76 ccw(c78.166,9.22) 76.37,11.016 69.095,3.741 cw(c67.299,5.537) 67.299,2.997 30.16,2.997 cw(c30.16,5.537) 28.364,3.741 27.152,4.953 cw(c28.747,6.547) 26.492,6.547
BAT on Bottom Layer "NONET_L-01_P-001" (solid, pour order 32): 26.086,7.467 26.086,5.675 ccw(c28.626,5.675) 26.83,3.879 27.305,3.403 cw(c26.937,3.403) 27.197,3.143 26.695,2.641 25.969,3.367 ccw(c25.882,3.281) 25.882,3.403 24.696,4.59 cw(c26.492,6.386) 23.952,6.386 23.952,7.442

## Keep-outs
Keep-Out Layer:
  lines w0.102: 0,0 0,0 ; 0,0 0,6.75 7.5,6.75 7.5,11.25 0,11.25 0,63.75 7.5,63.75 7.5,68.25 0,68.25 0,75 ; 0,0 94,0 94,75 0,75 ; 0,75 0,75

## Other copper
Bottom Layer:
  region: 26.293,70.776 26.293,67.575 28.401,67.575 28.401,70.776
  region: 23.753,70.776 23.753,67.575 25.861,67.575 25.861,70.776
  region: 21.213,70.776 21.213,67.575 23.321,67.575 23.321,70.776
  region: 78.613,10.776 78.613,7.575 80.721,7.575 80.721,10.776
  region: 81.153,10.776 81.153,7.575 83.261,7.575 83.261,10.776
  region: 83.693,10.776 83.693,7.575 85.801,7.575 85.801,10.776
  region: 83.247,4.224 83.247,7.425 81.139,7.425 81.139,4.224
  region: 80.707,4.224 80.707,7.425 78.599,7.425 78.599,4.224
  region: 78.167,4.224 78.167,7.425 76.059,7.425 76.059,4.224
  region net GND: 28.087,10.776 28.087,7.575 30.195,7.575 30.195,10.776
  region net GND: 26.513,10.776 26.513,7.575 28.621,7.575 28.621,10.776
  region net BAT: 23.973,10.776 23.973,7.575 26.081,7.575 26.081,10.776
  region: 21.433,10.776 21.433,7.575 23.541,7.575 23.541,10.776
  region: 18.893,10.776 18.893,7.575 21.001,7.575 21.001,10.776
  region: 16.353,10.776 16.353,7.575 18.461,7.575 18.461,10.776
  region: 13.813,10.776 13.813,7.575 15.921,7.575 15.921,10.776
  region: 11.273,10.776 11.273,7.575 13.381,7.575 13.381,10.776
  region: 23.527,4.224 23.527,7.425 21.419,7.425 21.419,4.224
  region: 20.987,4.224 20.987,7.425 18.879,7.425 18.879,4.224
  region: 18.447,4.224 18.447,7.425 16.339,7.425 16.339,4.224
  region: 15.907,4.224 15.907,7.425 13.799,7.425 13.799,4.224
  region: 13.367,4.224 13.367,7.425 11.259,7.425 11.259,4.224
  rectangle net GC_VIN: 4.724,20.853 7.925,22.961
  rectangle net GC_VOUT: 4.724,23.393 7.925,25.501
  rectangle: 4.724,25.933 7.925,28.041
  rectangle net MC_VIN: 4.724,28.473 7.925,30.581
  rectangle net MC_VOUT: 4.724,31.013 7.925,33.121
  rectangle: 4.724,33.553 7.925,35.661
  rectangle: 4.724,36.093 7.925,38.201
  rectangle: 4.724,38.633 7.925,40.741
  rectangle net DIGITALIN: 4.724,42.412 7.925,44.521
  rectangle net DIGITALIN: 4.724,41.173 7.925,43.281
  rectangle net DIGITALIN: 4.724,43.713 7.925,45.821
  rectangle net VOUT_START: 4.724,46.253 7.925,48.361
  rectangle net VOUT_SOL: 4.724,48.793 7.925,50.901
  rectangle: 4.724,53.873 7.925,55.981
  rectangle: 4.724,56.413 7.925,58.521
  rectangle: 4.724,58.953 7.925,61.061
  rectangle net VOUT_BUZZER: 4.724,51.333 7.925,53.441
  text "A2 rev4" at 84.747,24.32 h3.05 r45
  text "SIMCONS" at 26.924,12.243 h3.81

## Silkscreen, mask and mechanical layers (free items; w line width, h text height)
Top Overlay:
  circle w0.152: c64.83,66.655 r0.635
  lines w0.102: 94,75 0,75 0,68.25 7.5,68.25 7.5,63.75 0,63.75 0,11.25 7.5,11.25 7.5,6.75 0,6.75 0,0 94,0 94,75 ; 94,75 94,75
  text "A2 rev4" at 49.606,14.3 h5.08
  text "SIMCONS CONTROL SYSTMES" at 49.911,13.03 h1.52
  text "S/N:" at 37.262,2.21 h2.29
Bottom Overlay:
  lines w0.203: 0,0 0,6.75 ; 0,0 0,0 ; 0,0 94,0 ; 0,0 0,6.75 ; 0,0 0,0 ; 0,0 94,0 ; 0,6.75 7.5,6.75 7.5,11.25 0,11.25 0,63.75 7.5,63.75 7.5,68.25 0,68.25 0,75 94,75 ; 94,0 94,75 ; 94,75 94,75
Bottom Paste:
  rectangle: 0,0 94,75
Top Solder:
  lines w0.102: 0,0 94,0 ; 0,0 0,0 ; 0,0 0,6.75 7.5,6.75 7.5,11.25 0,11.25 0,63.75 7.5,63.75 7.5,68.25 0,68.25 0,75 94,75 94,0 ; 94,0 94,0
Bottom Solder:
  lines w0.102: 0,75 0,68.25 7.5,68.25 7.5,63.75 0,63.75 0,11.25 7.5,11.25 7.5,6.75 0,6.75 0,0 94,0 94,75 ; 0,75 0,75 ; 0,75 94,75 ; 94,75 94,75